# Altium PCB PCB.PcbDoc (part 2 of 2)
Units mil, origin at the board's own origin, x right, y up, seen from the top; angles counter-clockwise.
Board outline 2519.69 x 5118.11 mil, 2 copper layers (Top Layer, Bottom Layer); 143 components, 68 nets, 346 pads, 668 vias.
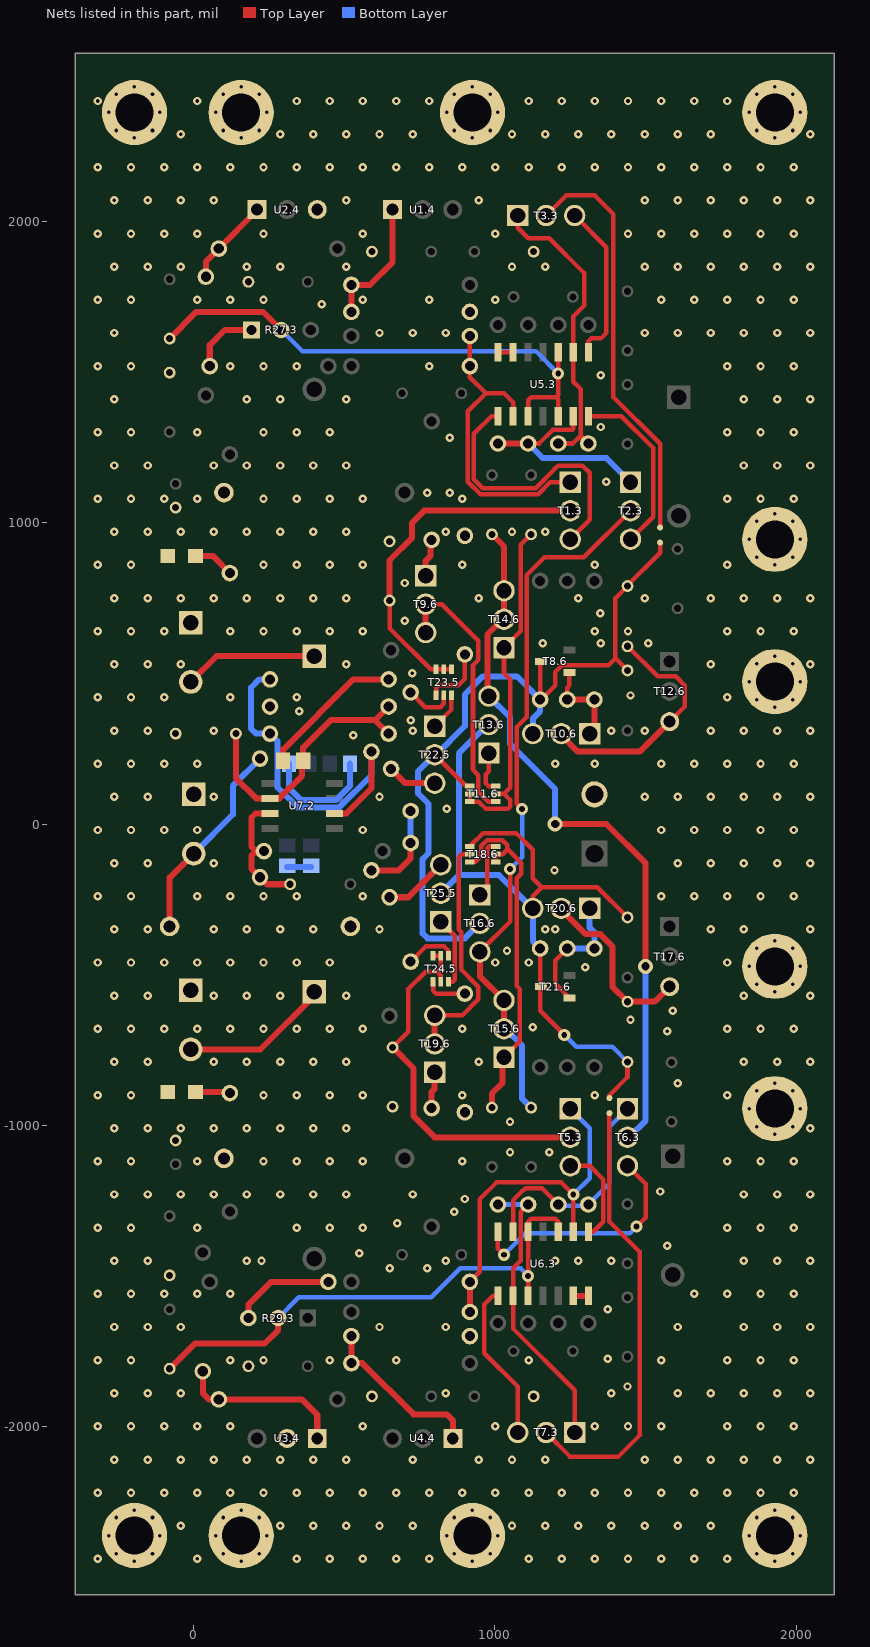
[diagram p2: the nets of this part, all layers, seen from the top]

## Via types
v1: diameter 28, hole 11.81, Top Layer to Bottom Layer, tented both sides, 652 vias
v2: diameter 40, hole 19.68, Top Layer to Bottom Layer, tented both sides, 9 vias
v3: diameter 50, hole 27.56, Top Layer to Bottom Layer, tented both sides, 7 vias

## Nets (pads, with @x,y where several pads share a name; then routed paths per layer and width w, separated by ;. In a path a pad name is that pad's centre, name@x,y a point inside that pad or via, vN(x,y) a via of type N, cw(c..) or ccw(c..) an arc to the next point about the centre after c; other vN are vias at no path point) (continued)
GND: C1.4.1 C2.4.2 C3.4.1 C4.4.1 C5.4.1 C6.4.1 C7.4.2 C8.4.2 C9.4.2 C10.4.2 C32.2.1 C33.2.1 C34.2.1 C35.2.2 C36.2.2 C38.5.1 C39.5.2 D1.4.2 D2.4.1 D3.4.1 D4.4.2 D7.2.1 MH1.1.MOUNTING MH2.1.MOUNTING MH3.1.MOUNTING MH4.1.MOUNTING MH5.4.MOUNTING MH6.4.MOUNTING MH7.4.MOUNTING MH8.4.MOUNTING MH11.6.MOUNTING MH12.6.MOUNTING MH13.6.MOUNTING MH14.6.MOUNTING P1.1.1 P2.1.1 P3.1.2 P4.1.1 R5.4.1 R6.4.1 R41.2.1 R46.5.1 R48.5.2 U2.4.3 U3.4.2 | length 472.7
  Bottom Layer w20: C35.2.2@310,-143.46 C36.2.2@390,-143.46 ; C33.2.1@316.54,200 316.54,118.46 355,80 472.91,80 518.46,125.55 C34.2.1@518.46,200
  other v1: -196.85,-2446.85 157.48,-2446.85 925.2,-2446.85 1929.13,-2446.85 -318.39,-2439.88 11.61,-2439.88 341.61,-2439.88 451.61,-2439.88 561.61,-2439.88 671.61,-2439.88 781.61,-2439.88 1111.61,-2439.88 1221.61,-2439.88 1331.61,-2439.88 1441.61,-2439.88 1551.61,-2439.88 1661.61,-2439.88 1771.61,-2439.88 -256.7,-2422.06 -137,-2422.06 97.63,-2422.06 217.33,-2422.06 865.34,-2422.06 985.05,-2422.06 1869.28,-2422.06 1988.99,-2422.06 -281.5,-2362.2 -112.2,-2362.2 72.83,-2362.2 242.13,-2362.2 840.55,-2362.2 1009.84,-2362.2 1844.49,-2362.2 2013.78,-2362.2 -43.39,-2329.88 286.61,-2329.88 396.61,-2329.88 506.61,-2329.88 616.61,-2329.88 726.61,-2329.88 1056.61,-2329.88 1166.61,-2329.88 1276.61,-2329.88 1386.61,-2329.88 1496.61,-2329.88 1606.61,-2329.88 1716.61,-2329.88 -256.7,-2302.35 -137,-2302.35 97.63,-2302.35 217.33,-2302.35 865.34,-2302.35 985.05,-2302.35 1869.28,-2302.35 1988.99,-2302.35 -196.85,-2277.55 157.48,-2277.55 925.2,-2277.55 1929.13,-2277.55 -318.39,-2219.88 -208.39,-2219.88 -98.39,-2219.88 11.61,-2219.88 121.61,-2219.88 231.61,-2219.88 341.61,-2219.88 451.61,-2219.88 561.61,-2219.88 671.61,-2219.88 781.61,-2219.88 891.61,-2219.88 1001.61,-2219.88 1111.61,-2219.88 1221.61,-2219.88 1331.61,-2219.88 1441.61,-2219.88 1551.61,-2219.88 1661.61,-2219.88 1771.61,-2219.88 1881.61,-2219.88 1991.61,-2219.88 -263.39,-2109.88 -153.39,-2109.88 -43.39,-2109.88 66.61,-2109.88 176.61,-2109.88 286.61,-2109.88 396.61,-2109.88 506.61,-2109.88 726.61,-2109.88 946.61,-2109.88 1056.61,-2109.88 1166.61,-2109.88 1496.61,-2109.88 1606.61,-2109.88 1716.61,-2109.88 1826.61,-2109.88 1936.61,-2109.88 2046.61,-2109.88 -318.39,-1999.88 -208.39,-1999.88 -98.39,-1999.88 11.61,-1999.88 121.61,-1999.88 561.61,-1999.88 1001.61,-1999.88 1331.61,-1999.88 1441.61,-1999.88 1551.61,-1999.88 1771.61,-1999.88 1881.61,-1999.88 1991.61,-1999.88 -263.39,-1889.88 -153.39,-1889.88 -43.39,-1889.88 836.61,-1889.88 1386.61,-1889.88 1606.61,-1889.88 1716.61,-1889.88 1826.61,-1889.88 1936.61,-1889.88 2046.61,-1889.88 1440,-1867.36 -318.39,-1779.88 -208.39,-1779.88 121.61,-1779.88 231.61,-1779.88 451.61,-1779.88 671.61,-1779.88 1111.61,-1779.88 1551.61,-1779.88 1771.61,-1779.88 1881.61,-1779.88 1991.61,-1779.88 1375,-1775 -263.39,-1669.88 -153.39,-1669.88 -43.39,-1669.88 616.61,-1669.88 836.61,-1669.88 1606.61,-1669.88 1826.61,-1669.88 1936.61,-1669.88 2046.61,-1669.88 1375,-1611.57 -318.39,-1559.88 -208.39,-1559.88 -98.39,-1559.88 11.61,-1559.88 121.61,-1559.88 1661.61,-1559.88 1771.61,-1559.88 1881.61,-1559.88 1991.61,-1559.88 650,-1475 775,-1475 -263.39,-1449.88 -153.39,-1449.88 176.61,-1449.88 225,-1450 836.61,-1449.88 1276.61,-1449.88 1386.61,-1449.88 1826.61,-1449.88 1936.61,-1449.88 2046.61,-1449.88 1200,-1449.31 550,-1425 1571.44,-1400 -318.39,-1339.88 -208.39,-1339.88 11.61,-1339.88 341.61,-1339.88 451.61,-1339.88 561.61,-1339.88 1771.61,-1339.88 1881.61,-1339.88 1991.61,-1339.88 675,-1325 865.34,-1286.85 900,-1245 -263.39,-1229.88 -153.39,-1229.88 -43.39,-1229.88 66.61,-1229.88 176.61,-1229.88 286.61,-1229.88 396.61,-1229.88 506.61,-1229.88 726.61,-1229.88 1826.61,-1229.88 1936.61,-1229.88 2046.61,-1229.88 1548.23,-1220 -318.39,-1119.88 -208.39,-1119.88 11.61,-1119.88 231.61,-1119.88 341.61,-1119.88 451.61,-1119.88 561.61,-1119.88 891.61,-1119.88 1771.61,-1119.88 1881.61,-1119.88 1991.61,-1119.88 1050,-1090 1180,-1090 1929.13,-1029.53 -263.39,-1009.88 -153.39,-1009.88 -43.39,-1009.88 66.61,-1009.88 176.61,-1009.88 286.61,-1009.88 396.61,-1009.88 506.61,-1009.88 2046.61,-1009.88 1869.28,-1004.74 1988.99,-1004.74 1050,-988.27 1844.48,-944.88 2013.78,-944.88 -318.39,-899.88 -208.39,-899.88 231.61,-899.88 341.61,-899.88 451.61,-899.88 561.61,-899.88 891.61,-899.88 1331.61,-899.88 1771.61,-899.88 1869.28,-885.03 1988.99,-885.03 1606.3,-860 1929.13,-860.24 -263.39,-789.88 -153.39,-789.88 66.61,-789.88 176.61,-789.88 286.61,-789.88 396.61,-789.88 506.61,-789.88 946.61,-789.88 1826.61,-789.88 1936.61,-789.88 2046.61,-789.88 1571.44,-687.56 -318.39,-679.88 -208.39,-679.88 -98.39,-679.88 11.61,-679.88 121.61,-679.88 231.61,-679.88 341.61,-679.88 451.61,-679.88 561.61,-679.88 891.61,-679.88 1771.61,-679.88 1881.61,-679.88 1991.61,-679.88 1125,-675 1450,-650 1590.01,-620 -263.39,-569.88 -153.39,-569.88 66.61,-569.88 176.61,-569.88 286.61,-569.88 506.61,-569.88 1826.61,-569.88 2046.61,-569.88 1929.13,-557.09 1869.28,-532.29 1988.99,-532.29 1300,-475 1844.48,-472.44 2013.78,-472.44 -318.39,-459.88 -208.39,-459.88 -98.39,-459.88 11.61,-459.88 121.61,-459.88 231.61,-459.88 341.61,-459.88 451.61,-459.88 1001.61,-459.88 1111.61,-459.88 1771.61,-459.88 1040,-420.59 1869.28,-412.59 1988.99,-412.59 1929.13,-387.8 -263.39,-349.88 -153.39,-349.88 66.61,-349.88 176.61,-349.88 286.61,-349.88 396.61,-349.88 616.61,-349.88 1166.61,-349.88 1200,-350 1716.61,-349.88 1826.61,-349.88 2046.61,-349.88 -318.39,-239.88 -208.39,-239.88 11.61,-239.88 121.61,-239.88 231.61,-239.88 341.61,-239.88 561.61,-239.88 1551.61,-239.88 1661.61,-239.88 1771.61,-239.88 1881.61,-239.88 1991.61,-239.88 1197.56,-153.7 -263.39,-129.88 -153.39,-129.88 66.61,-129.88 1606.61,-129.88 1716.61,-129.88 1826.61,-129.88 1936.61,-129.88 2046.61,-129.88 -318.39,-19.88 -208.39,-19.88 -98.39,-19.88 11.61,-19.88 561.61,-19.88 1551.61,-19.88 1661.61,-19.88 1771.61,-19.88 1881.61,-19.88 1991.61,-19.88 840.55,50 -263.39,90.12 -153.39,90.12 66.61,90.12 616.61,90.12 1496.61,90.12 1606.61,90.12 1716.61,90.12 1826.61,90.12 1936.61,90.12 2046.61,90.12 -318.39,200.12 -208.39,200.12 -98.39,200.12 11.61,200.12 1200,200 1331.61,200.12 1551.61,200.12 1661.61,200.12 1771.61,200.12 1881.61,200.12 1991.61,200.12 530,295.34 -263.39,310.12 -153.39,310.12 66.61,310.12 726.61,310.12 1386.61,310.12 1496.61,310.12 1716.61,310.12 1826.61,310.12 1936.61,310.12 2046.61,310.12 720,345 350,375 1929.13,387.8 1869.28,412.59 1988.99,412.59 -318.39,420.12 -208.39,420.12 -98.39,420.12 121.61,420.12 341.61,420.12 1771.61,420.12 1450,426.69 1844.48,472.44 2013.78,472.44 725,500 -263.39,530.12 -153.39,530.12 -43.39,530.12 506.61,530.12 1716.61,530.12 2046.61,530.12 1869.28,532.29 1988.99,532.29 1929.13,557.09 1158.15,600 1351.79,600 1508.43,600 -318.39,640.12 -208.39,640.12 -98.39,640.12 121.61,640.12 231.61,640.12 341.61,640.12 451.61,640.12 561.61,640.12 1331.61,640.12 1441.61,640.12 1771.61,640.12 1881.61,640.12 1991.61,640.12 700,675 1350,700 -263.39,750.12 -153.39,750.12 -43.39,750.12 66.61,750.12 176.61,750.12 286.61,750.12 396.61,750.12 506.61,750.12 946.61,750.12 1276.61,750.12 1496.61,750.12 1716.61,750.12 1826.61,750.12 1936.61,750.12 2046.61,750.12 700,800 -318.39,860.12 -208.39,860.12 231.61,860.12 341.61,860.12 451.61,860.12 561.61,860.12 891.61,860.12 1331.61,860.12 1771.61,860.12 1929.13,860.24 1869.28,885.03 1988.99,885.03 1844.48,944.88 2013.78,944.88 -263.39,970.12 -153.39,970.12 -43.39,970.12 66.61,970.12 176.61,970.12 286.61,970.12 396.61,970.12 506.61,970.12 836.61,970.12 1056.61,970.12 1166.61,970.12 1869.28,1004.74 1988.99,1004.74 1929.13,1029.53 -318.39,1080.12 -208.39,1080.12 -98.39,1080.12 11.61,1080.12 231.61,1080.12 341.61,1080.12 451.61,1080.12 561.61,1080.12 891.61,1080.12 1771.61,1080.12 1881.61,1080.12 1991.61,1080.12 775,1100 850,1100 1370,1136.72 -263.39,1190.12 -153.39,1190.12 66.61,1190.12 176.61,1190.12 286.61,1190.12 396.61,1190.12 506.61,1190.12 1826.61,1190.12 1936.61,1190.12 2046.61,1190.12 850,1281.81 -318.39,1300.12 -208.39,1300.12 11.61,1300.12 231.61,1300.12 341.61,1300.12 451.61,1300.12 1771.61,1300.12 1881.61,1300.12 1991.61,1300.12 1351.79,1318.01 -263.39,1410.12 176.61,1410.12 286.61,1410.12 506.61,1410.12 1826.61,1410.12 1936.61,1410.12 2046.61,1410.12 1351.79,1490 -318.39,1520.12 -208.39,1520.12 121.61,1520.12 231.61,1520.12 341.61,1520.12 781.61,1520.12 1771.61,1520.12 1881.61,1520.12 1991.61,1520.12 -263.39,1630.12 616.61,1630.12 726.61,1630.12 836.61,1630.12 1496.61,1630.12 1606.61,1630.12 1716.61,1630.12 1826.61,1630.12 1936.61,1630.12 2046.61,1630.12 425,1725 -318.39,1740.12 -208.39,1740.12 11.61,1740.12 121.61,1740.12 231.61,1740.12 561.61,1740.12 781.61,1740.12 1001.61,1740.12 1551.61,1740.12 1661.61,1740.12 1771.61,1740.12 1881.61,1740.12 1991.61,1740.12 -263.39,1850.12 -153.39,1850.12 -43.39,1850.12 176.61,1850.12 286.61,1850.12 506.61,1850.12 1056.61,1850.12 1166.61,1850.12 1496.61,1850.12 1606.61,1850.12 1716.61,1850.12 1826.61,1850.12 1936.61,1850.12 2046.61,1850.12 -318.39,1960.12 -208.39,1960.12 -98.39,1960.12 11.61,1960.12 231.61,1960.12 561.61,1960.12 1001.61,1960.12 1441.61,1960.12 1551.61,1960.12 1661.61,1960.12 1771.61,1960.12 1881.61,1960.12 1991.61,1960.12 -263.39,2070.12 -153.39,2070.12 -43.39,2070.12 66.61,2070.12 506.61,2070.12 946.61,2070.12 1496.61,2070.12 1606.61,2070.12 1716.61,2070.12 1826.61,2070.12 1936.61,2070.12 2046.61,2070.12 -318.39,2180.12 -208.39,2180.12 -98.39,2180.12 11.61,2180.12 121.61,2180.12 231.61,2180.12 341.61,2180.12 451.61,2180.12 561.61,2180.12 671.61,2180.12 781.61,2180.12 891.61,2180.12 1001.61,2180.12 1111.61,2180.12 1221.61,2180.12 1331.61,2180.12 1441.61,2180.12 1551.61,2180.12 1661.61,2180.12 1771.61,2180.12 1881.61,2180.12 1991.61,2180.12 -196.85,2277.56 157.48,2277.56 925.2,2277.56 1929.13,2277.56 -43.39,2290.12 286.61,2290.12 396.61,2290.12 506.61,2290.12 616.61,2290.12 726.61,2290.12 1056.61,2290.12 1166.61,2290.12 1276.61,2290.12 1386.61,2290.12 1496.61,2290.12 1606.61,2290.12 1716.61,2290.12 2046.61,2290.12 -256.7,2302.35 -137,2302.35 97.63,2302.35 217.33,2302.35 865.34,2302.35 985.05,2302.35 1869.28,2302.35 1988.99,2302.35 -281.5,2362.2 -112.2,2362.2 72.83,2362.2 242.13,2362.2 840.55,2362.2 1009.84,2362.2 1844.49,2362.2 2013.78,2362.2 -318.39,2400.12 11.61,2400.12 341.61,2400.12 451.61,2400.12 561.61,2400.12 671.61,2400.12 781.61,2400.12 1111.61,2400.12 1221.61,2400.12 1331.61,2400.12 1441.61,2400.12 1551.61,2400.12 1661.61,2400.12 1771.61,2400.12 -256.7,2422.06 -137,2422.06 97.63,2422.06 217.33,2422.06 865.34,2422.06 985.05,2422.06 1869.28,2422.06 1988.99,2422.06 -196.85,2446.85 157.48,2446.85 925.2,2446.85 1929.13,2446.85
IBIAS_N1: C38.5.2 T1.3.2 T23.5.1 T23.5.2 T23.5.3 | length 1184.8
  Top Layer w15: C38.5.2@650,741.57 650,650 786.69,513.31 T23.5.3@804.41,513.31 T23.5.2@830,513.31 T23.5.1@855.59,513.31
  Top Layer w20: C38.5.2@650,741.57 650,875 725,950 725,1000 765,1040 T1.3.2@1250,1040
IBIAS_N2: C27.6.2 T2.3.2 T15.6.2 T15.6.3 T16.6.3 | length 2352.7
  Top Layer w15: T16.6.3@950,-424.49 1050,-324.49 v2(1050,-150) ; v2(1090,50) 1072.58,67.42 1072.58,321.93 1104.94,354.29 1104.94,825.51 1164.45,885.03 1295.03,885.03 T2.3.2@1450,1040
  Top Layer w20: T16.6.3@950,-424.49 950,-505.51 T15.6.3@1030,-585.51 T15.6.2@1030,-680
  Bottom Layer w15: v2(1050,-150) 1090,-110 v2(1090,50)
  Bottom Layer w20: T15.6.2@1030,-680 1034.66,-680 1090,-735.34 1090,-911.57 C27.6.2@1120,-941.57
IBIAS_N3: J1.6.1 T3.3.2 | length 1381.1
  Top Layer w15: T3.3.2@1170,2020 1236.61,2086.61 1331.34,2086.61 1393.43,2024.53 1393.43,1417.26 1548.23,1262.46 J1.6.1@1548.23,984.25
IBIAS_P1: C39.5.1 T5.3.2 T24.5.2 T24.5.3 T24.5.5 | length 1263.7
  Top Layer w15: C39.5.1@660,-741.57 712.36,-689.21 712.36,-547.64 770,-490 807.8,-490 ; T24.5.3@794.41,-436.69 T24.5.2@820,-436.69 820,-477.8 807.8,-490 ; T24.5.5@820,-523.31 820,-502.2 807.8,-490
  Top Layer w20: C39.5.1@660,-741.57 730,-811.57 730,-970 800,-1040 T5.3.2@1250,-1040
IBIAS_P2: C24.6.1 T6.3.2 T13.6.3 T14.6.2 T14.6.3 | length 2391.8
  Top Layer w20: T13.6.3@980,424.49 974.57,424.49 974.57,629.23 1025.34,680 T14.6.2@1030,680 T14.6.3@1030,774.49 1030,921.57 C24.6.1@990,961.57 ; v3(1200,0) 1370,0 1500,-130 v3(1500,-472.44)
  Bottom Layer w20: T13.6.3@980,424.49 1050,354.49 1050,266.14 1200,116.14 v3(1200,0) ; T6.3.2@1440,-1040 1444.66,-1040 1500,-984.66 v3(1500,-472.44)
IBIAS_P3: J2.6.1 T7.3.2 | length 1484.2
  Top Layer w15: T7.3.2@1170,-2020 1170,-2021.13 1248.87,-2100 1410,-2100 1480,-2030 1480,-1420 1380,-1320 J2.6.1@1380,-960
IBIASN_REF: C19.3.1 R27.3.2 U5.3.3 U5.3.5 U5.3.10 | length 1780.3
  Top Layer w15: U5.3.3@1110,1353.7 1110,1406.85 1120,1416.85 1203.15,1416.85 ; U5.3.5@1210,1353.7 1210,1410 1203.15,1416.85 ; U5.3.10@1210,1566.3 v2(1210,1495) 1210,1423.7 1203.15,1416.85
  Top Layer w20: C19.3.1@-80,1611.57 8.43,1700 230,1700 R27.3.2@290,1640
  Bottom Layer w15: R27.3.2@290,1640 360,1570 1135,1570 v2(1210,1495)
IBIASP_REF: C20.3.2 R29.3.2 U6.3.3 U6.3.5 U6.3.10 | length 1750.2
  Top Layer w15: U6.3.10@1110,-1566.3 v2(1110,-1500) U6.3.5@1110,-1353.7 1110,-1320 1120,-1310 1200,-1310 1210,-1320 U6.3.3@1210,-1353.7
  Top Layer w20: C20.3.2@-80,-1808.43 3.43,-1725 235,-1725 280,-1680 R29.3.2@280,-1640
  Bottom Layer w15: R29.3.2@280,-1640 348.43,-1571.57 788.43,-1571.57 885.06,-1474.94 1084.94,-1474.94 v2(1110,-1500)
IN_1_STAGE: D7.2.2 P4.1.2 R42.2.1 | length 681.1
  Top Layer w20: D7.2.2@-80,-340 -80,-178.43 P4.1.2@0,-98.43
  Bottom Layer w20: P4.1.2@0,-98.43 130,31.57 130,126.85 R42.2.1@220,216.85
IN_2_STAGE: R45.5.1 R47.5.2 R_TEST1.2.2 | length 303.4
  Top Layer w20: R_TEST1.2.2@590,-153.7 680,-153.7 720,-113.7 R47.5.2@720,-63.15
  Bottom Layer w20: R47.5.2@720,-63.15 R45.5.1@720,43.15
IN_N_3_STAGE: C26.6.1 C29.6.1 J2.6.2 R35.6.1 T13.6.2 T18.6.4 T20.6.3 T21.6.3 T25.5.2 | length 2574.9
  Top Layer w15: T18.6.4@916.69,-74.41 961.1,-30 1070,-30 1125.51,-85.51 1125.51,-180 1155.51,-210 ; T20.6.3@1125.51,-280 1125.51,-240 1155.51,-210 ; R35.6.1@1150,-413.15 T21.6.3@1150,-537.24 ; T21.6.3@1152.76,-540 T21.6.3@1150,-537.24 ; v2(1230,-700) 1150,-620 T21.6.3@1150,-537.24 ; J2.6.2@1380,-910 1380,-900 1440,-840 C29.6.1@1440,-790 ; C26.6.1@1440,-310 1440,-309.9 1340.1,-210 1155.51,-210
  Bottom Layer w15: v2(1230,-700) 1270,-740 1390,-740 C29.6.1@1440,-790
  Bottom Layer w20: T25.5.2@820,-230 880,-170 ; T13.6.2@980,330 975.34,330 880,234.66 880,-170 ; R35.6.1@1150,-413.15 1125.51,-388.66 T20.6.3@1125.51,-280 1123.43,-280 1013.43,-170 880,-170
IN_P_3_STAGE: C23.6.2 C25.6.2 J1.6.2 R34.6.2 T8.6.3 T10.6.3 T11.6.4 T16.6.2 T22.5.2 | length 2667.9
  Top Layer w15: T22.5.2@800,230 904.41,125.59 T11.6.4@916.69,125.59 ; R34.6.2@1150,413.15 1150,537.24 T8.6.3@1152.76,540 T8.6.3@1166.61,540 ; R34.6.2@1153.15,413.15 1200,460 1200,504.53 1222.38,526.91 1376.91,526.91 1400,550 ; C25.6.2@1440,510 1400,550 ; J1.6.2@1548.23,934.25 1548.23,900.82 1440,792.59 C23.6.2@1440,790 1400,750 1400,550
  Bottom Layer w20: T16.6.2@950,-330 900.08,-379.92 776.28,-379.92 760,-363.64 760,-116.28 780,-96.28 780,66.28 744.57,101.72 744.57,174.57 T22.5.2@800,230 804.66,230 900,325.34 900,430 960,490 1073.15,490 R34.6.2@1150,413.15 ; T10.6.3@1125.51,300 1125.51,350 1150,374.49 R34.6.2@1150,413.15 ; R34.6.2@1153.15,413.15 R34.6.2@1150,413.15
NetC22.6_1: C22.6.1 T11.6.2 T11.6.5 T11.6.6 T14.6.1 | length 1172.4
  Top Layer w15: T11.6.5@916.69,100 T11.6.6@916.69,74.41 945.59,74.41 970,50 1042.93,50 1050,57.07 1050,80 1030,100 ; T11.6.2@1003.31,100 1030,100 ; 1090,931.57 1084.94,926.52 ; C22.6.1@1120,961.57 1084.94,926.52 ; 1030,100 1050,120 1050,480 1030,500 T14.6.1@1030,585.51 1084.94,640.45 1084.94,926.52
NetC23.6_1: C23.6.1 T10.6.2 T12.6.3 | length 813.6
  Top Layer w15: C23.6.1@1440,590 1540,490 1600,490 1630,460 1630,390 T12.6.3@1580,340
  Top Layer w20: T10.6.2@1220,300 1220,295.34 1275.34,240 1480,240 T12.6.3@1580,340
NetC28.6_2: C28.6.2 T15.6.1 T18.6.1 T18.6.2 T18.6.6 | length 1190
  Top Layer w15: T18.6.6@916.69,-125.59 934.41,-125.59 954.57,-105.43 954.57,-72.66 973.59,-53.64 1024.23,-53.64 1040,-69.41 1040,-85.51 ; T18.6.1@1003.31,-125.59 T18.6.2@1003.31,-100 1025.51,-100 1040,-85.51 ; T15.6.1@1030,-774.49 1082.93,-721.56 1082.93,-547.93 1072.58,-537.58 1072.58,-180.45 1087.5,-165.53 1087.5,-129.47 1043.54,-85.51 1040,-85.51
  Top Layer w20: C28.6.2@990,-941.57 990,-894.23 1024.23,-860 1024.23,-780.26 T15.6.1@1030,-774.49
NetC29.6_2: C29.6.2 T17.6.3 T20.6.2 | length 590.4
  Top Layer w20: T20.6.2@1220,-280 1220,-284.66 1300.93,-365.59 1349.7,-365.59 1390,-405.89 1390,-540 C29.6.2@1440,-590 1530,-590 T17.6.3@1580,-540
NetC31.2_1: C31.2.1 C32.2.2 R39.2.1 R41.2.2 U7.2.2 | length 924.7
  Top Layer w20: C32.2.2@140,300 140,152.48 207.48,85 U7.2.2@252.72,85 284.49,85 360,160.51 360,206.54 C31.2.1@363.46,210 363.46,253.46 455,345 601.85,345 ; R39.2.1@646.85,300 601.85,345 ; R41.2.2@646.85,390 601.85,345
NetC31.2_2: C31.2.2 R40.2.1 | length 483.6
  Top Layer w20: C31.2.2@296.54,210 296.54,246.54 530,480 R40.2.1@646.85,480
NetC37.2_1: C37.2.1 R42.2.2 R43.2.1 U7.2.3 | length 425.4
  Top Layer w20: R43.2.1@233.15,-90 R43.2.1@206.85,-90 ; U7.2.3@252.72,35 205,35 191.57,21.57 191.57,-74.72 R43.2.1@206.85,-90 ; C37.2.1@320,-200 243.15,-200 R42.2.2@220,-176.85 191.57,-148.43 191.57,-105.28 R43.2.1@206.85,-90
NetD1.4_1: D1.4.1 R2.4.1 | length 137.3
  Top Layer w20: D1.4.1@6.26,890 63.15,890 R2.4.1@120,833.15
NetD3.4_2: D3.4.2 R10.4.1 | length 115
  Top Layer w20: D3.4.2@6.26,-890 116.85,-890 R10.4.1@120,-893.15
NetR1.4_1: R1.4.1 R3.4.2 U2.4.1 | length 293.6
  Top Layer w20: R1.4.1@40,1816.85 40,1866.85 R3.4.2@83.15,1910 210,2036.85 U2.4.1@210,2040
NetR4.4_2: R4.4.2 R5.4.2 U1.4.1 | length 432.9
  Top Layer w20: R5.4.2@523.15,1700 R4.4.2@523.15,1790 585,1790 660,1865 U1.4.1@660,2040
NetR6.4_2: R6.4.2 R8.4.2 U4.4.1 | length 565.6
  Top Layer w20: R6.4.2@523.15,-1700 R8.4.2@523.15,-1790 560,-1790 730,-1960 840,-1960 860,-1980 U4.4.1@860,-2040
NetR7.4_2: R7.4.2 R9.4.2 U3.4.1 | length 561.2
  Top Layer w20: R9.4.2@30,-1816.85 30,-1890 50,-1910 R7.4.2@83.15,-1910 358.46,-1910 410,-1961.54 U3.4.1@410,-2040
NetR11.3_1: R11.3.1 R12.3.1 T1.3.1 U5.3.2 | length 1052.5
  Top Layer w15: R12.3.1@916.85,1620 R11.3.1@916.85,1520 916.85,1483.15 970,1430 ; U5.3.2@1060,1353.7 1060,1400 1030,1430 970,1430 ; T1.3.1@1250,1134.49 1182.77,1134.49 1143.28,1095 951.72,1095 910,1136.72 910,1370 970,1430
NetR13.3_1: R13.3.1 R14.3.1 T2.3.1 U5.3.6 | length 705.5
  Top Layer w15: R14.3.1@1110,1263.15 1146.28,1263.15 1191.34,1308.21 1256.63,1308.21 1260,1311.57 U5.3.6@1260,1353.7
  Top Layer w20: R13.3.1@1010,1263.15 R14.3.1@1110,1263.15
  Bottom Layer w20: R14.3.1@1110,1263.15 1158.15,1215 1369.49,1215 T2.3.1@1450,1134.49
NetR15.3_1: R15.3.1 R16.3.1 T3.3.1 U5.3.9 | length 1009.1
  Top Layer w15: T3.3.1@1075.51,2020 1075.51,1979.98 1110.49,1945 1180,1945 1295.61,1829.39 1295.61,1720.61 1260,1685 U5.3.9@1260,1566.3 1260,1468.43 1284.31,1444.11 1284.31,1288.84 ; R15.3.1@1210,1263.15 1258.62,1263.15 1284.31,1288.84 ; R16.3.1@1310,1263.15 1284.31,1288.84
NetR19.3_2: R19.3.2 R20.3.2 T5.3.1 U6.3.2 | length 1205.6
  Top Layer w15: R20.3.2@916.85,-1520 950,-1486.85 950,-1245 1005,-1190 1220,-1190 v2(1260,-1230) U6.3.2@1260,-1353.7
  Top Layer w20: R19.3.2@916.85,-1620 R20.3.2@916.85,-1520
  Bottom Layer w15: T5.3.1@1250,-945.51 1314.49,-1010 1314.49,-1175.51 v2(1260,-1230) v2@1260,-1220
NetR21.3_2: R21.3.2 R22.3.2 T6.3.1 U6.3.6 | length 767.7
  Top Layer w15: U6.3.6@1060,-1353.7 1060,-1249.43 1091.34,-1218.09 1091.91,-1218.09 1100,-1210 1156.85,-1210 R22.3.2@1210,-1263.15
  Bottom Layer w15: R22.3.2@1210,-1263.15 1214.35,-1267.5 1305.65,-1267.5 R21.3.2@1310,-1263.15 1380,-1193.15 1380,-1005.51 T6.3.1@1440,-945.51
NetR23.3_2: R23.3.2 R24.3.2 T7.3.1 U6.3.9 | length 962.3
  Top Layer w15: R23.3.2@1110,-1263.15 1085.69,-1287.46 1085.69,-1449.31 1060,-1475 U6.3.9@1060,-1566.3 1060,-1675 1264.49,-1879.49 T7.3.1@1264.49,-2020
  Bottom Layer w15: R24.3.2@1010,-1263.15 R23.3.2@1110,-1263.15
NetR27.3_1: R27.3.1 R30.3.2 | length 229.1
  Top Layer w20: R30.3.2@53.15,1520 53.15,1590 103.15,1640 R27.3.1@191.57,1640
NetR28.3_1: R28.3.1 R29.3.3 | length 341
  Top Layer w20: R29.3.3@181.57,-1640 181.57,-1595.55 257.13,-1520 R28.3.1@446.85,-1520
NetR31.6_1: R31.6.1 T9.6.1 | length 126.9
  Top Layer w20: T9.6.1@770,824.49 770,873.31 786.69,890 786.69,939.84 R31.6.1@790,943.15
NetR32.6_1: R32.6.1 R33.6.1 T8.6.1 T10.6.1 | length 302
  Top Layer w15: R32.6.1@1240,413.15 1240,452.76 1247.24,460 T8.6.1@1247.24,502.6
  Top Layer w20: R32.6.1@1240,413.15 R33.6.1@1330,413.15 1330,315.51 T10.6.1@1314.49,300
NetR36.6_2: R36.6.2 T19.6.1 | length 122.8
  Top Layer w20: R36.6.2@790,-943.15 790,-889.44 800,-879.44 T19.6.1@800,-824.49
NetR37.6_2: R37.6.2 R38.6.2 T20.6.1 T21.6.1 | length 430
  Top Layer w15: R37.6.2@1240,-413.15 1200,-453.15 1200,-530.16 T21.6.1@1247.24,-577.4
  Bottom Layer w20: R37.6.2@1240,-413.15 R38.6.2@1330,-413.15 1330,-360 1314.49,-344.49 T20.6.1@1314.49,-280
NetR39.2_2: R39.2.2 R40.2.2 R_TEST1.2.1 U7.2.6 | length 1209.9
  Top Layer w20: U7.2.6@467.28,35 506.57,35 590,118.43 R_TEST1.2.1@590,240
  Bottom Layer w20: R40.2.2@253.15,480 217.56,480 190,452.44 190,316.85 206.85,300 R39.2.2@253.15,300 277.91,275.24 277.91,121.73 344.64,55 483.27,55 590,161.73 R_TEST1.2.1@590,240
NetR44.5_1: R44.5.1 T22.5.3 | length 164.7
  Top Layer w20: R44.5.1@655,183.15 702.64,135.51 T22.5.3@800,135.51
NetR45.5_2: R45.5.2 T23.5.5 | length 162.1
  Top Layer w15: R45.5.2@720,436.85 769.06,387.8 817.8,387.8 830,400 T23.5.5@830,426.69
NetR46.5_2: R46.5.2 T23.5.4 | length 216.1
  Top Layer w15: T23.5.4@804.41,426.69 804.41,454.41 810,460 878.43,460 900,481.57 R46.5.2@900,563.15
NetR47.5_1: R47.5.1 T24.5.1 | length 168.9
  Top Layer w15: R47.5.1@720,-456.85 770.96,-405.89 830.89,-405.89 845.59,-420.59 T24.5.1@845.59,-436.69
NetR48.5_1: R48.5.1 T24.5.4 | length 139.6
  Top Layer w15: T24.5.4@794.41,-523.31 794.41,-553.15 804.41,-563.15 R48.5.1@900,-563.15
NetR49.5_1: R49.5.1 T25.5.3 | length 214.6
  Top Layer w20: R49.5.1@650,-243.15 712.36,-243.15 T25.5.3@820,-135.51
NetT1.3_3: T1.3.3 U5.3.1 | length 939.3
  Top Layer w15: U5.3.1@1010,1353.7 988.7,1353.7 930,1295 930,1145 960,1115 1135,1115 1197.07,1177.07 1197.07,1177.17 1209.9,1190 1290.1,1190 1314.49,1165.61 1314.49,1010 T1.3.3@1250,945.51
NetT2.3_3: T2.3.3 U5.3.7 | length 592.6
  Top Layer w15: U5.3.7@1310,1353.7 1419.69,1353.7 1525,1248.39 1525,1020.51 T2.3.3@1450,945.51
NetT3.3_3: T3.3.3 U5.3.8 | length 540.9
  Top Layer w15: T3.3.3@1264.49,2020 1370,1914.49 1370,1630 1351.79,1611.79 1320,1611.79 1310,1601.79 U5.3.8@1310,1566.3
NetT5.3_3: T5.3.3 U6.3.1 | length 332.8
  Top Layer w15: T5.3.3@1250,-1134.49 1314.49,-1134.49 1360,-1180 1360,-1320 1326.3,-1353.7 U6.3.1@1310,-1353.7
NetT6.3_3: T6.3.3 U6.3.7 | length 802.8
  Top Layer w15: U6.3.7@1010,-1353.7 1010,-1410 v2(1030,-1430) ; T6.3.3@1440,-1134.49 1500,-1194.49 1500,-1306.85 v2(1470,-1336.85)
  Bottom Layer w15: v2(1030,-1430) 1100.65,-1359.35 1447.5,-1359.35 v2(1470,-1336.85)
NetT7.3_3: T7.3.3 U6.3.8 | length 527.7
  Top Layer w15: U6.3.8@1010,-1566.3 993.7,-1566.3 964.94,-1595.06 964.94,-1756.79 1075.51,-1867.36 T7.3.3@1075.51,-2020
NetT9.6_2: T9.6.2 T9.6.3 T11.6.1 | length 908.1
  Top Layer w15: T9.6.2@770,730 823.27,730 945.06,608.21 945.06,544.49 927.07,526.49 927.07,179.94 944.94,162.07 944.94,106.67 977.2,74.41 T11.6.1@1003.31,74.41
  Top Layer w20: T9.6.3@770,635.51 T9.6.2@770,730
NetT11.6_3: T11.6.3 T13.6.1 | length 142.1
  Top Layer w15: T13.6.1@980,235.51 980,175.43 970,165.43 970,134.57 978.98,125.59 T11.6.3@1003.31,125.59
NetT16.6_1: T16.6.1 T18.6.3 | length 196.2
  Top Layer w15: T16.6.1@950,-235.51 974.57,-210.94 974.57,-80.94 981.1,-74.41 T18.6.3@1003.31,-74.41
NetT18.6_5: T18.6.5 T19.6.2 T19.6.3 | length 801.4
  Top Layer w15: T19.6.3@800,-635.51 891.36,-635.51 945.06,-581.81 945.06,-539.86 888.43,-483.23 888.43,-358.43 880,-350 880,-110 890,-100 T18.6.5@916.69,-100
  Top Layer w20: T19.6.2@800,-730 T19.6.3@800,-635.51
NetT22.5_1: T22.5.1 T23.5.6 | length 125.2
  Top Layer w15: T22.5.1@800,324.49 855.59,380.08 T23.5.6@855.59,426.69
NetT24.5_6: T24.5.6 T25.5.1 | length 234.6
  Top Layer w15: T25.5.1@820,-324.49 866.36,-370.85 866.36,-516.24 859.29,-523.31 T24.5.6@845.59,-523.31
NetU5.3_13: U5.3.13 U5.3.14 | length 50
  Top Layer w15: U5.3.14@1010,1566.3 U5.3.13@1060,1566.3
NetU6.3_13: U6.3.13 U6.3.14 | length 50
  Top Layer w20: U6.3.13@1260,-1566.3 U6.3.14@1310,-1566.3
VCC: F2.4.1 P2.1.2 | length 496.8
  Top Layer w20: P2.1.2@-10,-748.43 221.57,-748.43 400,-570 F2.4.1@400,-557.09
VDD: F1.4.1 P1.1.2 | length 445.4
  Top Layer w20: P1.1.2@-10,471.57 75.51,557.09 F1.4.1@400,557.09
pads on no net: U7.2.1 U7.2.5

## Polygon pours and split planes (outlines as drawn)
GND on Top Layer "GND_L01_P002" (solid, remove dead copper, pour order 2): -393.7,-2559.06 2125.98,-2559.06 2125.98,2559.06 -393.7,2559.06
GND on Bottom Layer "GND_L02_P000" (solid, remove dead copper, pour order 0): -393.7,-2559.06 2125.98,-2559.06 2125.98,2559.06 -393.7,2559.06

## Keep-outs
Keep-Out Layer:
  the board outline again, w6

## Silkscreen, mask and mechanical layers (free items; w line width, h text height)
Top Overlay:
  lines w6: -380,-2220 -210,-2220 ; -380,-1600 -210,-1600 ; -380,-950 -210,-950 ; -317,-1791 -310,-1803
  text "GND" at -380,630 h50
  text "+30V" at -380,436.85 h50
  text "GND" at -380,60 h50
  text "GND" at 1586.3,60 h50
  text "OUT" at 1580,-129.88 h50
  text "IN" at -380,-135.51 h50
  text "GND" at -380,-590 h50
  text "-30V" at -380,-780 h50
  text "POWER AMPLIFIER WITH / HIGH SLEW RATE" at -360,-980 h30 r270
  text "DR PIOTR OTFINOWSKI / MICHAL KOWALIK" at -360,-1640 h30 r270
Mechanical 1:
  the board outline again, w7.87
Drill Drawing:
  circle w10: c-293.08,3323.63 r33.33
  lines w10: -326.41,2873.63 -293.08,2840.3 -259.74,2873.63 -293.08,2906.96 -326.41,2873.63 ; -326.41,2990.3 -259.74,2990.3 -259.74,3056.96 -326.41,3056.96 -326.41,2990.3 ; -326.41,3156.96 -309.74,3156.96 -293.08,3140.3 -276.41,3156.96 -259.74,3156.96 -276.41,3173.63 -259.74,3190.3 -276.41,3190.3 -293.08,3206.96 -309.74,3190.3 -326.41,3190.3 -309.74,3173.63 -326.41,3156.96 ; -326.41,3440.3 -293.08,3456.96 -259.74,3440.3 -276.41,3473.63 -259.74,3506.96 -293.08,3490.3 -326.41,3506.96 -309.74,3473.63 -326.41,3440.3 ; -326.41,3590.3 -326.41,3606.96 -309.74,3623.63 -326.41,3640.3 -326.41,3656.96 -309.74,3656.96 -293.08,3640.3 -276.41,3656.96 -259.74,3656.96 -259.74,3640.3 -276.41,3623.63 -259.74,3606.96 -259.74,3590.3 -276.41,3590.3 -293.08,3606.96 -309.74,3590.3 -326.41,3590.3 ; -326.41,3740.3 -259.74,3740.3 -259.74,3806.96 -326.41,3806.96 -326.41,3740.3 ; -326.41,3906.96 -309.74,3906.96 -309.74,3890.3 -276.41,3890.3 -276.41,3906.96 -259.74,3906.96 -259.74,3940.3 -276.41,3940.3 -276.41,3956.96 -309.74,3956.96 -309.74,3940.3 -326.41,3940.3 -326.41,3906.96 ; -326.41,4106.96 -259.74,4106.96 -293.08,4040.3 -326.41,4106.96 ; -313.08,3753.63 -273.08,3753.63 -273.08,3793.63 -313.08,3793.63 -313.08,3753.63
  lines w15: -386.2,2795.3 11360.48,2795.3 ; -386.2,4145.3 11360.48,4145.3 ; 164.67,2645.3 164.67,4295.3 ; 764.52,2645.3 764.52,4295.3 ; 1934.17,2645.3 1934.17,4295.3 ; 2440.05,2645.3 2440.05,4295.3 ; 3173.85,2645.3 3173.85,4295.3 ; 4673.4,2645.3 4673.4,4295.3 ; 5263.25,2645.3 5263.25,4295.3 ; 6009.05,2645.3 6009.05,4295.3 ; 7058.74,2645.3 7058.74,4295.3 ; 8648.27,2645.3 8648.27,4295.3 ; 9981.87,2645.3 9981.87,4295.3 ; -386.2,2645.3 11360.48,2645.3 11360.48,4295.3 -386.2,4295.3 -386.2,2645.3
  text "Symbol" at -296.2,4190.3 h72
  text "Count" at 209.67,4190.3 h72
  text "Hole Size" at 809.52,4190.3 h72
  text "Plated" at 1979.17,4190.3 h72
  text "Hole Type" at 2485.05,4190.3 h72
  text "Drill Layer Pair" at 3218.85,4190.3 h72
  text "Via/Pad" at 4718.4,4190.3 h72
  text "Pad Shape" at 5308.25,4190.3 h72
  text "Template" at 6054.05,4190.3 h72
  text "Description" at 7103.74,4190.3 h72
  text "Hole Tolerance (+)" at 8693.27,4190.3 h72
  text "Hole Tolerance (-)" at 10026.87,4190.3 h72
  text "2" at 209.67,4040.3 h60
  text "59,06mil (1,500mm)" at 809.52,4040.3 h60
  text "PTH" at 1979.17,4040.3 h60
  text "Round" at 2485.05,4040.3 h60
  text "Top Layer - Bottom Layer" at 3218.85,4040.3 h60
  text "Pad" at 4718.4,4040.3 h60
  text "(Mixed)" at 5308.25,4040.3 h60
  text "(Mixed)" at 6054.05,4040.3 h60
  text "7" at 209.67,3890.3 h60
  text "27,56mil (0,700mm)" at 809.52,3890.3 h60
  text "PTH" at 1979.17,3890.3 h60
  text "Round" at 2485.05,3890.3 h60
  text "Top Layer - Bottom Layer" at 3218.85,3890.3 h60
  text "Via" at 4718.4,3890.3 h60
  text "Rounded" at 5308.25,3890.3 h60
  text "v127h70m0mx0" at 6054.05,3890.3 h60
  text "via 0.7mm 1.3mm no tenning" at 7103.74,3890.3 h60
  text "9" at 209.67,3740.3 h60
  text "19,69mil (0,500mm)" at 809.52,3740.3 h60
  text "PTH" at 1979.17,3740.3 h60
  text "Round" at 2485.05,3740.3 h60
  text "Top Layer - Bottom Layer" at 3218.85,3740.3 h60
  text "Via" at 4718.4,3740.3 h60
  text "Rounded" at 5308.25,3740.3 h60
  text "v102h50m0mx0" at 6054.05,3740.3 h60
  text "via 0.5mm 1mm" at 7103.74,3740.3 h60
  text "12" at 209.67,3590.3 h60
  text "125,98mil (3,200mm)" at 809.52,3590.3 h60
  text "PTH" at 1979.17,3590.3 h60
  text "Round" at 2485.05,3590.3 h60
  text "Top Layer - Bottom Layer" at 3218.85,3590.3 h60
  text "Pad" at 4718.4,3590.3 h60
  text "Rounded" at 5308.25,3590.3 h60
  text "c550h320m550p550" at 6054.05,3590.3 h60
  text "24" at 209.67,3440.3 h60
  text "39,37mil (1,000mm)" at 809.52,3440.3 h60
  text "PTH" at 1979.17,3440.3 h60
  text "Round" at 2485.05,3440.3 h60
  text "Top Layer - Bottom Layer" at 3218.85,3440.3 h60
  text "Pad" at 4718.4,3440.3 h60
  text "(Mixed)" at 5308.25,3440.3 h60
  text "(Mixed)" at 6054.05,3440.3 h60
  text "62" at 209.67,3290.3 h60
  text "51,18mil (1,300mm)" at 809.52,3290.3 h60
  text "PTH" at 1979.17,3290.3 h60
  text "Round" at 2485.05,3290.3 h60
  text "Top Layer - Bottom Layer" at 3218.85,3290.3 h60
  text "Pad" at 4718.4,3290.3 h60
  text "(Mixed)" at 5308.25,3290.3 h60
  text "(Mixed)" at 6054.05,3290.3 h60
  text "68" at 209.67,3140.3 h60
  text "23,62mil (0,600mm)" at 809.52,3140.3 h60
  text "PTH" at 1979.17,3140.3 h60
  text "Round" at 2485.05,3140.3 h60
  text "Top Layer - Bottom Layer" at 3218.85,3140.3 h60
  text "Pad" at 4718.4,3140.3 h60
  text "Rounded" at 5308.25,3140.3 h60
  text "c100h60" at 6054.05,3140.3 h60
  text "94" at 209.67,2990.3 h60
  text "33,47mil (0,850mm)" at 809.52,2990.3 h60
  text "PTH" at 1979.17,2990.3 h60
  text "Round" at 2485.05,2990.3 h60
  text "Top Layer - Bottom Layer" at 3218.85,2990.3 h60
  text "Pad" at 4718.4,2990.3 h60
  text "(Mixed)" at 5308.25,2990.3 h60
  text "(Mixed)" at 6054.05,2990.3 h60
  text "652" at 209.67,2840.3 h60
  text "11,81mil (0,300mm)" at 809.52,2840.3 h60
  text "PTH" at 1979.17,2840.3 h60
  text "Round" at 2485.05,2840.3 h60
  text "Top Layer - Bottom Layer" at 3218.85,2840.3 h60
  text "Via" at 4718.4,2840.3 h60
  text "Rounded" at 5308.25,2840.3 h60
  text "v71h30m0mx0" at 6054.05,2840.3 h60
  text "via 0.3mm 0.71mm" at 7103.74,2840.3 h60
  text "930 Total" at 209.67,2690.3 h60

## Dimensions
2244.09,-2559.06 to 2125.98,2559.06 on Mechanical 1
2125.98,-2559.06 to -393.7,-2519.68 on Mechanical 1